# Altium PCB Programmer_V0.05.pcbdoc
Units mil, origin at the board's own origin, x right, y up, seen from the top; angles counter-clockwise.
Board outline 2501.99 x 1262.09 mil, 2 copper layers (Top Layer, Bottom Layer); 5 components, 9 nets, 27 pads, 3 vias.
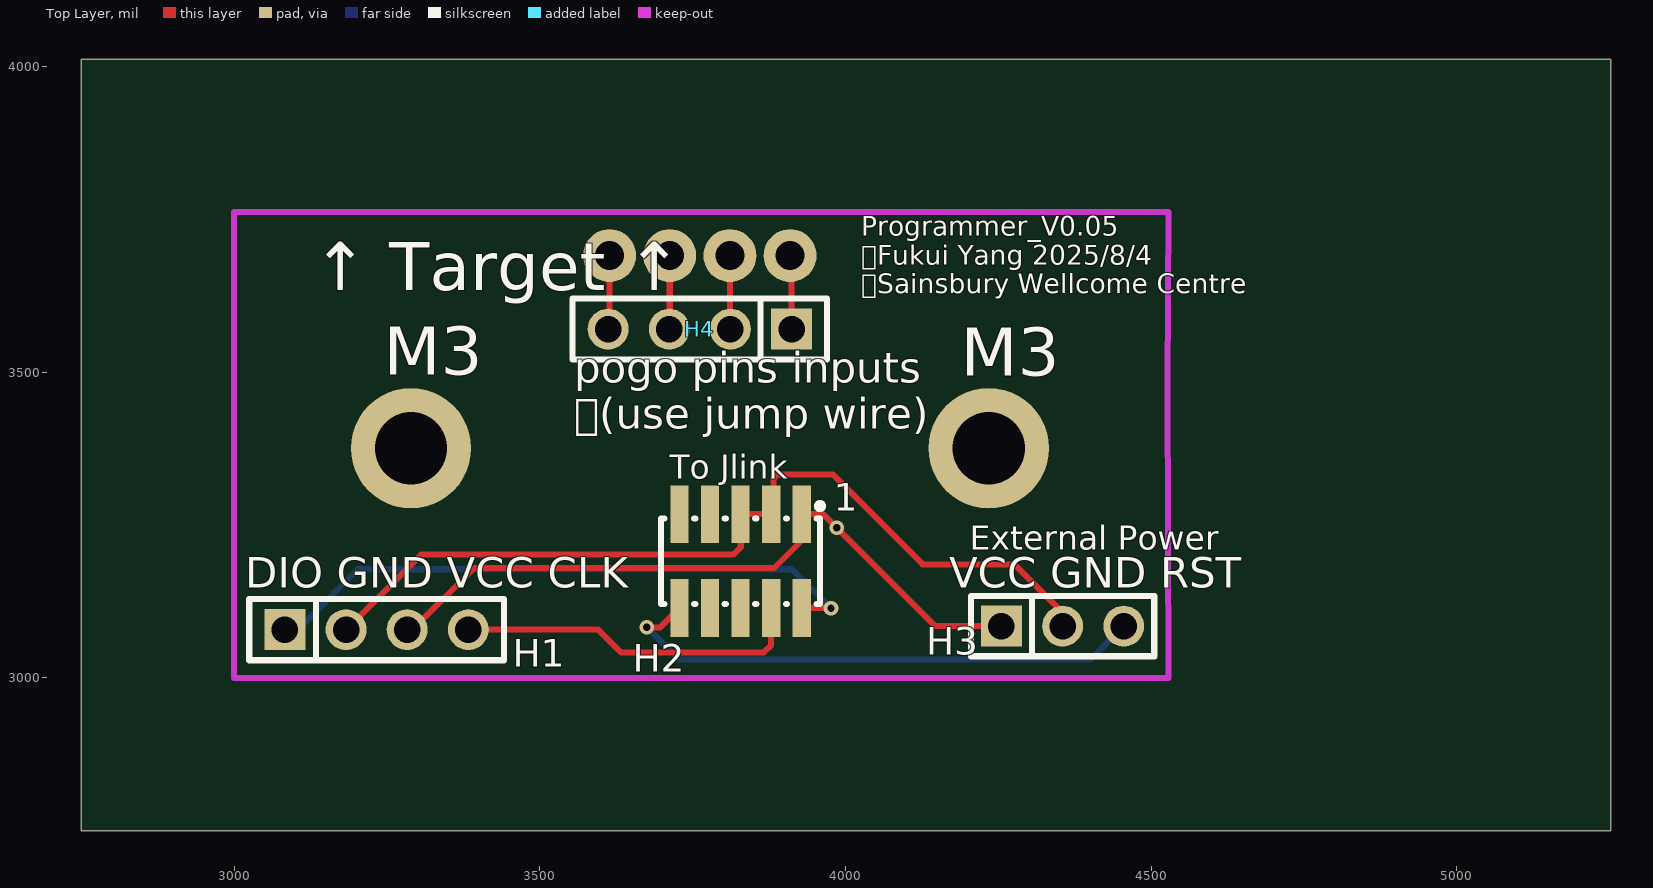
[diagram p0: Top Layer view]
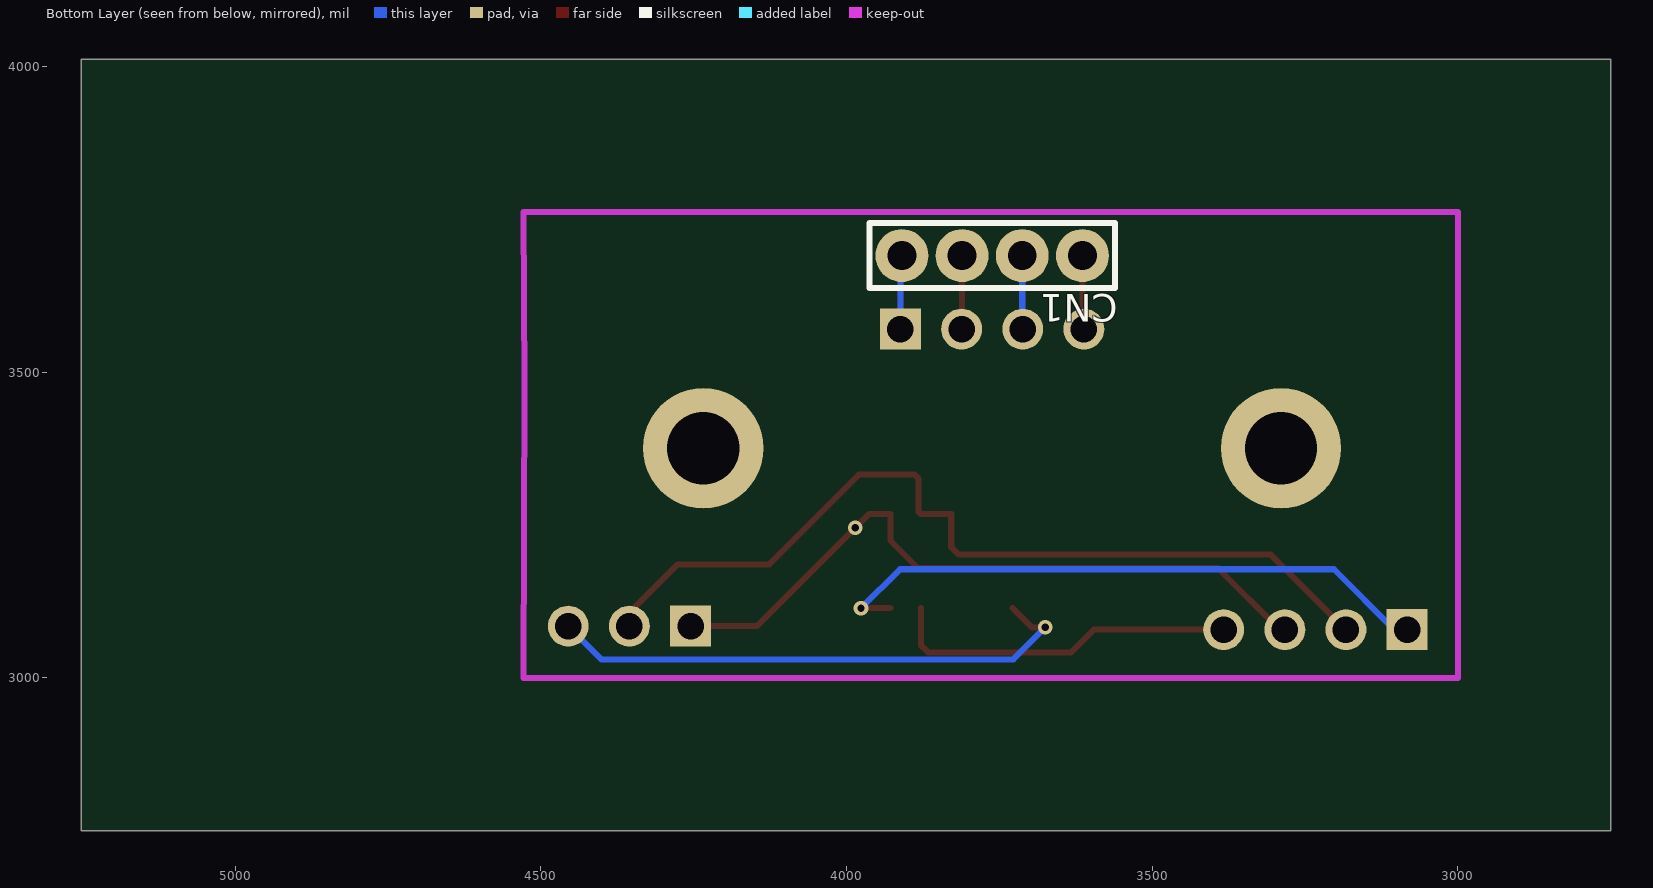
[diagram p1: Bottom Layer view, seen from below]

## Layer stack, top to bottom
Top Layer: signal copper (thickness not stored)
Dielectric: dielectric 12.6, FR-4, Dk 4.8
Bottom Layer: signal copper (thickness not stored)

## Board outline
5251.99,2750 2750,2750 2750,4012.09 5251.99,4012.09

## Design rules (kind name [scope] priority, off if disabled: settings)
BoardOutlineClearance copperThickness1oz [All] p0: genericclearance=10 ignorepadtopadclearanceinfootprint=FALSE except(0: Arc-SplitContinuation Track-SplitContinuation SMDPad-SplitContinuation THPad-SplitContinuation Via-SplitContinuation Fill-SplitContinuation Poly-SplitContinuation Region-SplitContinuation Text-SplitContinuation; 6: SMDPad-CutoutEdge THPad-CutoutEdge Via-CutoutEdge Fill-CutoutEdge Region-CutoutEdge; 11.8: Track-OutlineEdge SMDPad-OutlineEdge THPad-OutlineEdge Via-OutlineEdge Fill-OutlineEdge Region-OutlineEdge Poly-OutlineEdge Text-OutlineEdge Track-CutoutEdge)
BoardOutlineClearance copperThickness2oz [All] p0: genericclearance=10 ignorepadtopadclearanceinfootprint=FALSE except(0: Arc-SplitContinuation Track-SplitContinuation SMDPad-SplitContinuation THPad-SplitContinuation Via-SplitContinuation Fill-SplitContinuation Poly-SplitContinuation Region-SplitContinuation Text-SplitContinuation; 6: SMDPad-CutoutEdge THPad-CutoutEdge Via-CutoutEdge Fill-CutoutEdge Region-CutoutEdge; 11.8: Track-OutlineEdge SMDPad-OutlineEdge THPad-OutlineEdge Via-OutlineEdge Fill-OutlineEdge Region-OutlineEdge Poly-OutlineEdge Text-OutlineEdge Track-CutoutEdge)
Clearance copperThickness1oz [(InNet('GND') OR InNet('SWDIO') OR InNet('SWCLK') OR InNet('VCC') OR InNet('RST') OR InNet('$1N2057') OR InNet('$1N2061') OR InNet('$1N2065') OR InNet('$1N2069'))] p1: gap=7 ignorepadtopadclearanceinfootprint=FALSE except(4: Track-Track; 6: Track-SMDPad SMDPad-SMDPad Track-THPad SMDPad-THPad THPad-THPad Track-Via SMDPad-Via THPad-Via Via-Via Track-Fill SMDPad-Fill THPad-Fill Via-Fill Fill-Fill SMDPad-Region THPad-Region Via-Region Fill-Region Region-Region Track-Poly SMDPad-Poly THPad-Poly Via-Poly Fill-Poly Poly-Poly Track-Text SMDPad-Text THPad-Text Via-Text Fill-Text Region-Text Poly-Text Text-Text; 6.9: Track-Hole SMDPad-Hole THPad-Hole Via-Hole Fill-Hole Region-Hole Poly-Hole Text-Hole Sheet-Hole; 11.8: Track-Region Region-Poly Track-Sheet SMDPad-Sheet THPad-Sheet Via-Sheet Fill-Sheet Region-Sheet Poly-Sheet Text-Sheet)
Clearance copperThickness2oz [All] p1: gap=7 ignorepadtopadclearanceinfootprint=FALSE except(6: Track-SMDPad SMDPad-SMDPad Track-THPad SMDPad-THPad THPad-THPad Track-Via SMDPad-Via THPad-Via Via-Via Track-Fill SMDPad-Fill THPad-Fill Via-Fill Fill-Fill SMDPad-Region THPad-Region Via-Region Fill-Region Region-Region Track-Poly SMDPad-Poly THPad-Poly Via-Poly Fill-Poly Poly-Poly Track-Text SMDPad-Text THPad-Text Via-Text Fill-Text Region-Text Poly-Text Text-Text; 6.9: Track-Hole SMDPad-Hole THPad-Hole Via-Hole Fill-Hole Region-Hole Poly-Hole Text-Hole Sheet-Hole; 8: Track-Track; 11.8: Track-Region Region-Poly Track-Sheet SMDPad-Sheet THPad-Sheet Via-Sheet Fill-Sheet Region-Sheet Poly-Sheet Text-Sheet)
DiffPairsRouting differentialPair [All] p1: maxuncoupledlength=10 minlimit=5.9843 maxlimit=5.9843 mostfreqgap=5.9843 toplayer_minwidth=5 toplayer_prefwidth=10 toplayer_maxwidth=100 bottomlayer_minwidth=5 bottomlayer_prefwidth=10 bottomlayer_maxwidth=100
PasteMaskExpansion pasteMaskExpansion [All] p1: expansion=0
PlaneConnect innerPlane [All] p1: planeconnectstyle=Relief reliefexpansion=20 reliefentries=4 reliefconductorwidth=10 reliefairgap=10
PolygonConnect copperRegion [All] p1: connectstyle=Relief reliefentries=4 reliefconductorwidth=10 polygonreliefangle="90 Angle" airgapwidth=10
RoutingVias viaSize [All] p1: viastyle="Through Hole" holewidth=12.0078 minholewidth=11.811 maxholewidth=248.0314 width=24.0158 minwidth=19.685 maxwidth=393.7008
SolderMaskExpansion solderMaskExpansion [All] p1: useseparateexpansions=TRUE expansion=2.0079 expansionbottom=2.0079
Width copperThickness1oz [All] p1: maxlimit=100 minlimit=5 preferedwidth=10
Width copperThickness2oz [All] p1: maxlimit=100 minlimit=8 preferedwidth=10

## Components (designator, comment, footprint, x,y, rotation, side; value= is the part's Value field where it differs from the comment)
CN1 "YZ202715118P-04025-01" BAT-TH_4P-P2.50_YZ202715118P-04025-01 3761.91,3690.79 r0 bottom
H1 "2.54-1*4P母" HDR-TH_4P-P2.54-V-F 3233.2,3078.94 r0 top
H2 "20021121-00010C4LF" HDR-SMD_10P-P1.27-V-M-R2-C5-S1.27-LS5.5 3828.5,3191.1 r180 top
H3 "PZ254V-11-03P" HDR-TH_3P-P2.54-V-M 4355.31,3084.68 r0 top
H4 "2.54-1*4P母" HDR-TH_4P-P2.54-V-F 3761.91,3570.59 r180 top

## Footprints (in the part's own frame and the unit in brackets; to place one, negate y for a bottom-side part, rotate by r counter-clockwise, add the part's x,y. Pads: shape width x height; smd on the part's side, far side on the other; paste and mask are expansions set on the pad)
BAT-TH_4P-P2.50_YZ202715118P-04025-01 [mm]
  round 2.2 hole 1.2: 1(-3.75,0) 2(-1.25,0) 3(1.25,0) 4(3.75,0)
  silkscreen extent -5.1,-1.35 5.1,1.35
HDR-SMD_10P-P1.27-V-M-R2-C5-S1.27-LS5.5 [mm]
  rect 0.76x2.4 smd: 1(-2.54,-1.95) 2(-2.54,1.95) 3(-1.27,-1.95) 4(-1.27,1.95) 5(0,-1.95) 6(0,1.95) 7(1.27,-1.95) 8(1.27,1.95) 9(2.54,-1.95) 10(2.54,1.95)
  silkscreen extent -3.43,-2.41 3.3,1.78
HDR-TH_3P-P2.54-V-M [mm]
  rect 1.7x1.7 hole 1.1: 1(-2.54,0)
  round 1.7 hole 1.1: 2(0,0) 3(2.54,0)
  silkscreen extent -3.81,-1.25 3.81,1.25
HDR-TH_4P-P2.54-V-F [mm]
  rect 1.7x1.7 hole 1.1: 1(-3.81,0)
  round 1.7 hole 1.1: 2(-1.27,0) 3(1.27,0) 4(3.81,0)
  silkscreen extent -5.29,-1.27 5.29,1.27

## Free pads (board coordinates)
  round 196.85 hole 118.11: 1(3289.47,3375.83) 1(4234.35,3375.83)

## Via types
v1: diameter 24.02, hole 12.01, Top Layer to Bottom Layer, 3 vias

## Nets (pads, with @x,y where several pads share a name; then routed paths per layer and width w, separated by ;. In a path a pad name is that pad's centre, name@x,y a point inside that pad or via, vN(x,y) a via of type N, cw(c..) or ccw(c..) an arc to the next point about the centre after c; other vN are vias at no path point)
$1N2057: CN1.1 H4.4 | length 121.2
  Top Layer w10: H4.4 3614.27,3572.95 CN1.1
$1N2061: CN1.2 H4.3 | length 240.7
  Top Layer w10: H4.3 3712.7,3571.38 CN1.2
  Bottom Layer w10: H4.3@3712.7,3570.59 CN1.2
$1N2065: CN1.3 H4.2 | length 120.5
  Top Layer w10: CN1.3 3811.12,3571.38 H4.2
$1N2069: CN1.4 H4.1 | length 242.4
  Top Layer w10: CN1.4@3909.55,3690.79 3911.91,3688.43 H4.1
  Bottom Layer w10: CN1.4@3909.55,3690.79 3911.96,3688.38 H4.1@3911.96,3570.59
GND: H1.2 H2.3 H2.5 H3.2 | length 1456.8
  Top Layer w10: H1.2 3306.09,3201.83 3816.86,3201.83 3828.86,3213.83 3828.86,3267.51 H2.5 H2.3 3882.26,3271.63 3882.26,3325.83 3889.33,3332.9 3979.46,3332.9 4126.53,3185.83 4275.91,3185.83 4355.31,3106.42 H3.2
RST: H2.10 H3.3 | length 891.3
  Top Layer w10: v1(3674.88,3082.67) 3696.84,3082.67 H2.10
  Bottom Layer w10: v1(3674.88,3082.67) 3727.08,3030.47 4401.1,3030.47 H3.3
SWCLK: H1.4 H2.4 | length 576.3
  Top Layer w10: H1.4 3595.6,3078.94 3632.71,3041.83 3866.76,3041.83 3878.5,3053.56 H2.4
SWDIO: H1.1 H2.2 | length 1009.1
  Top Layer w10: H2.2 3976.06,3114.33 v1(3976.56,3113.83)
  Bottom Layer w10: H1.1 3103.92,3078.94 3202.81,3177.83 3912.56,3177.83 v1(3976.56,3113.83)
VCC: H1.3 H2.1 H3.1 | length 1151.5
  Top Layer w10: H1.3 3291.67,3078.94 3392.56,3179.83 3883.51,3179.83 3928.5,3224.81 H2.1 3963.67,3267.87 v1(3985.71,3245.83) 4146.86,3084.68 H3.1
pads on no net: H2.6 H2.7 H2.8 H2.9

## Keep-outs
Board Outline Layer:
  lines w10: 3000,3000 4528.65,3000 4526.86,3480.55 4528.65,3762.09 3000,3762.09 3000,3000

## Silkscreen, mask and mechanical layers (free items; w line width, h text height)
Top Silkscreen Layer:
  text "↑ Target ↑" at 3129.11,3633.83 h78.74
  text "Programmer_V0.05 /  Fukui Yang 2025/8/4 /  Sainsbury Wellcome Centre" at 4025.61,3628.82 h31.5
  text "M3" at 3245.18,3496.3 h78.74
  text "M3" at 4189.09,3494.29 h78.74
  text "pogo pins inputs  /  (use jump wire)" at 3556.81,3407.83 h50
  text "To Jlink" at 3712.46,3325.83 h39.37
  text "1" at 3981.05,3273.42 h45
  text "External Power" at 4203.51,3209.83 h39.37
  text "DIO GND VCC CLK" at 3018.46,3147.83 h50
  text "VCC GND RST" at 4170.11,3147.83 h50